# Altium PCB matrix_8x8_ws2812_LEDs.PcbDoc (part 1 of 2)
Units mm, origin at the board's own origin, x right, y up, seen from the top; angles counter-clockwise.
Board outline 65 x 70 mm, 2 copper layers (Top Layer, Bottom Layer); 134 components, 67 nets, 393 pads, 128 vias.
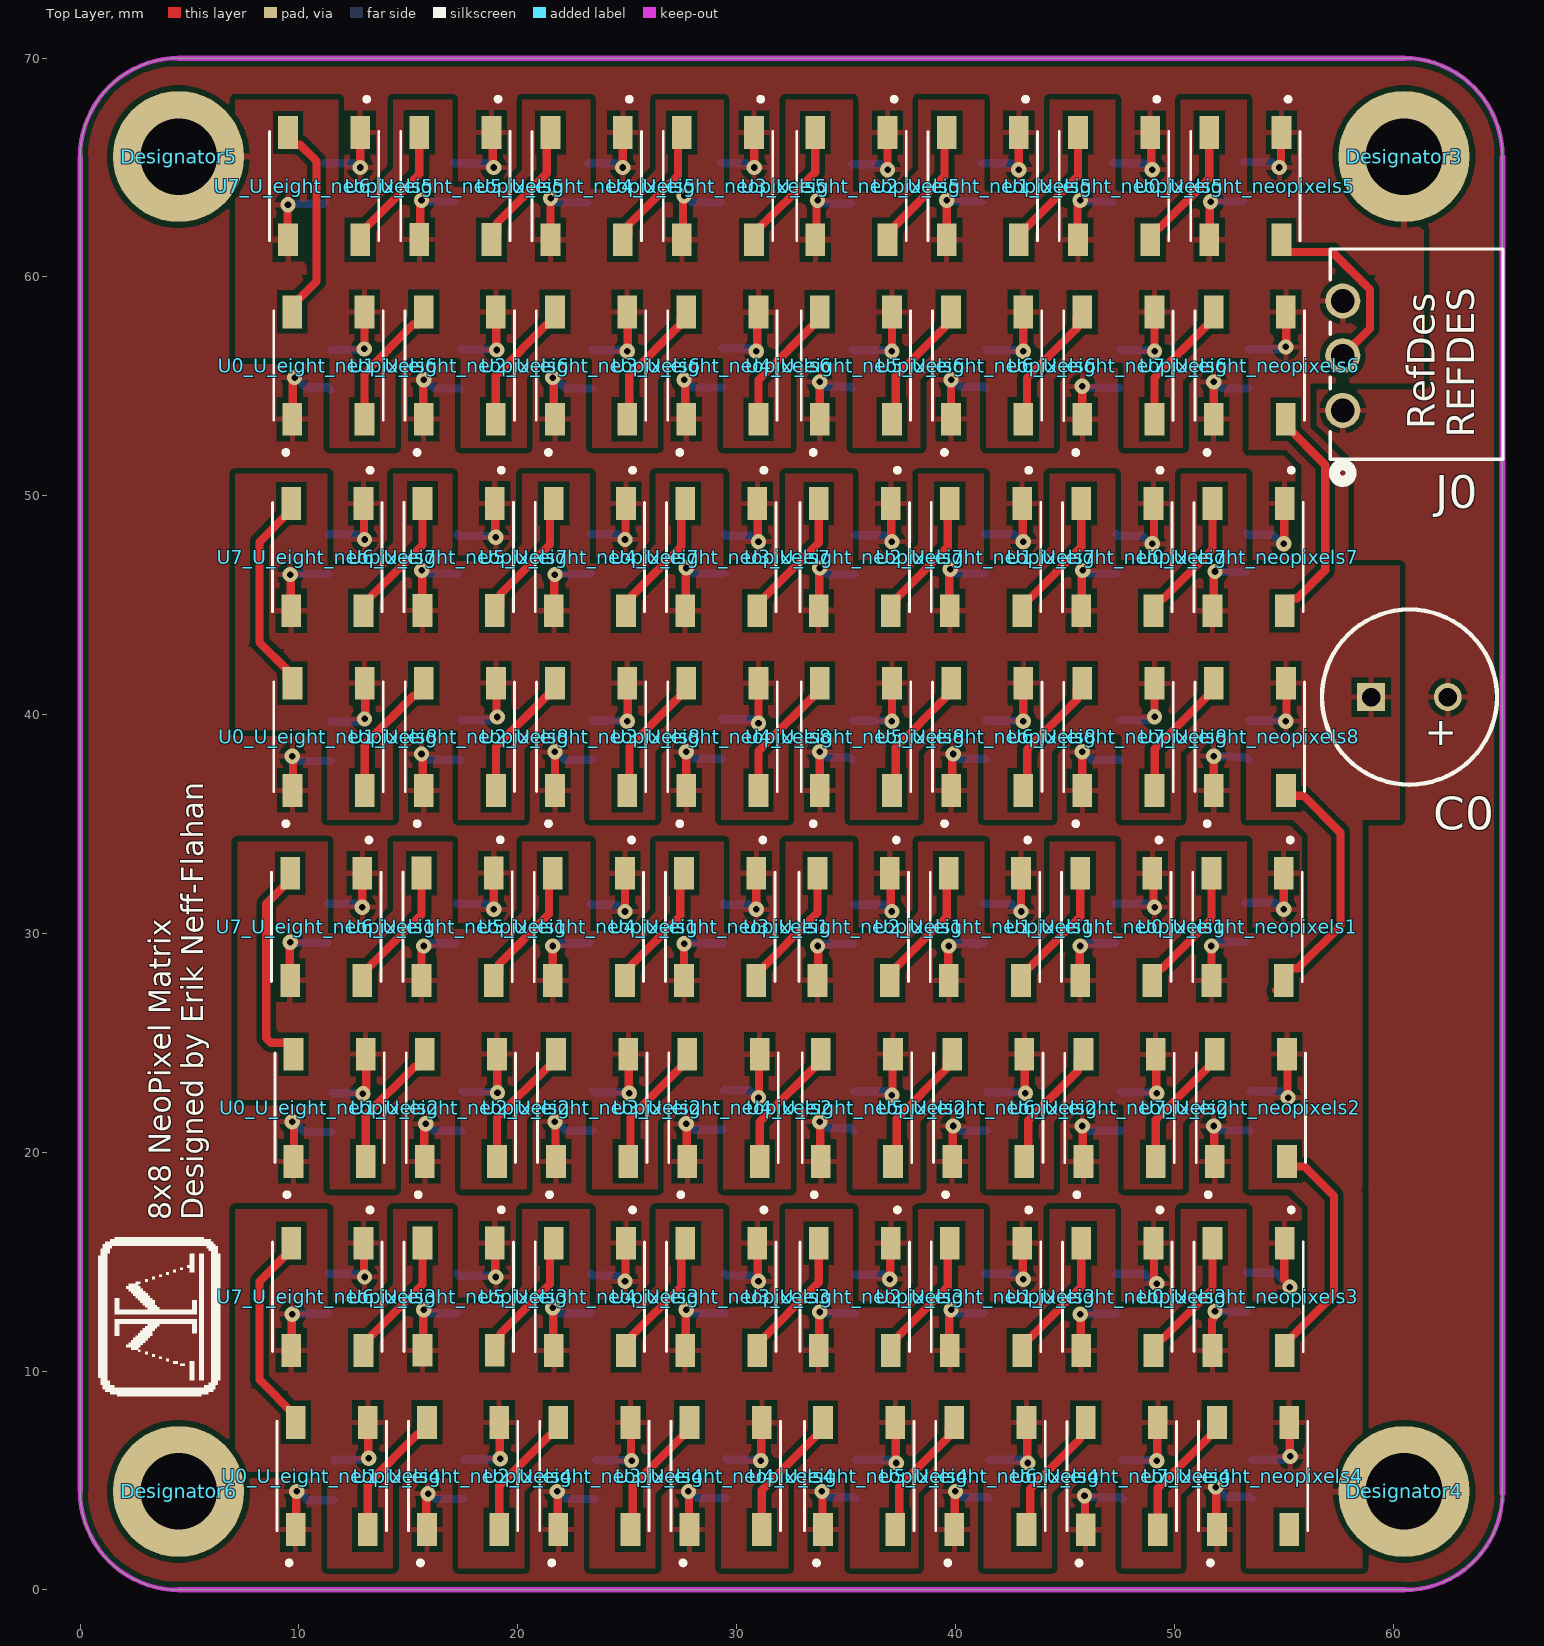
[diagram p0: Top Layer view]
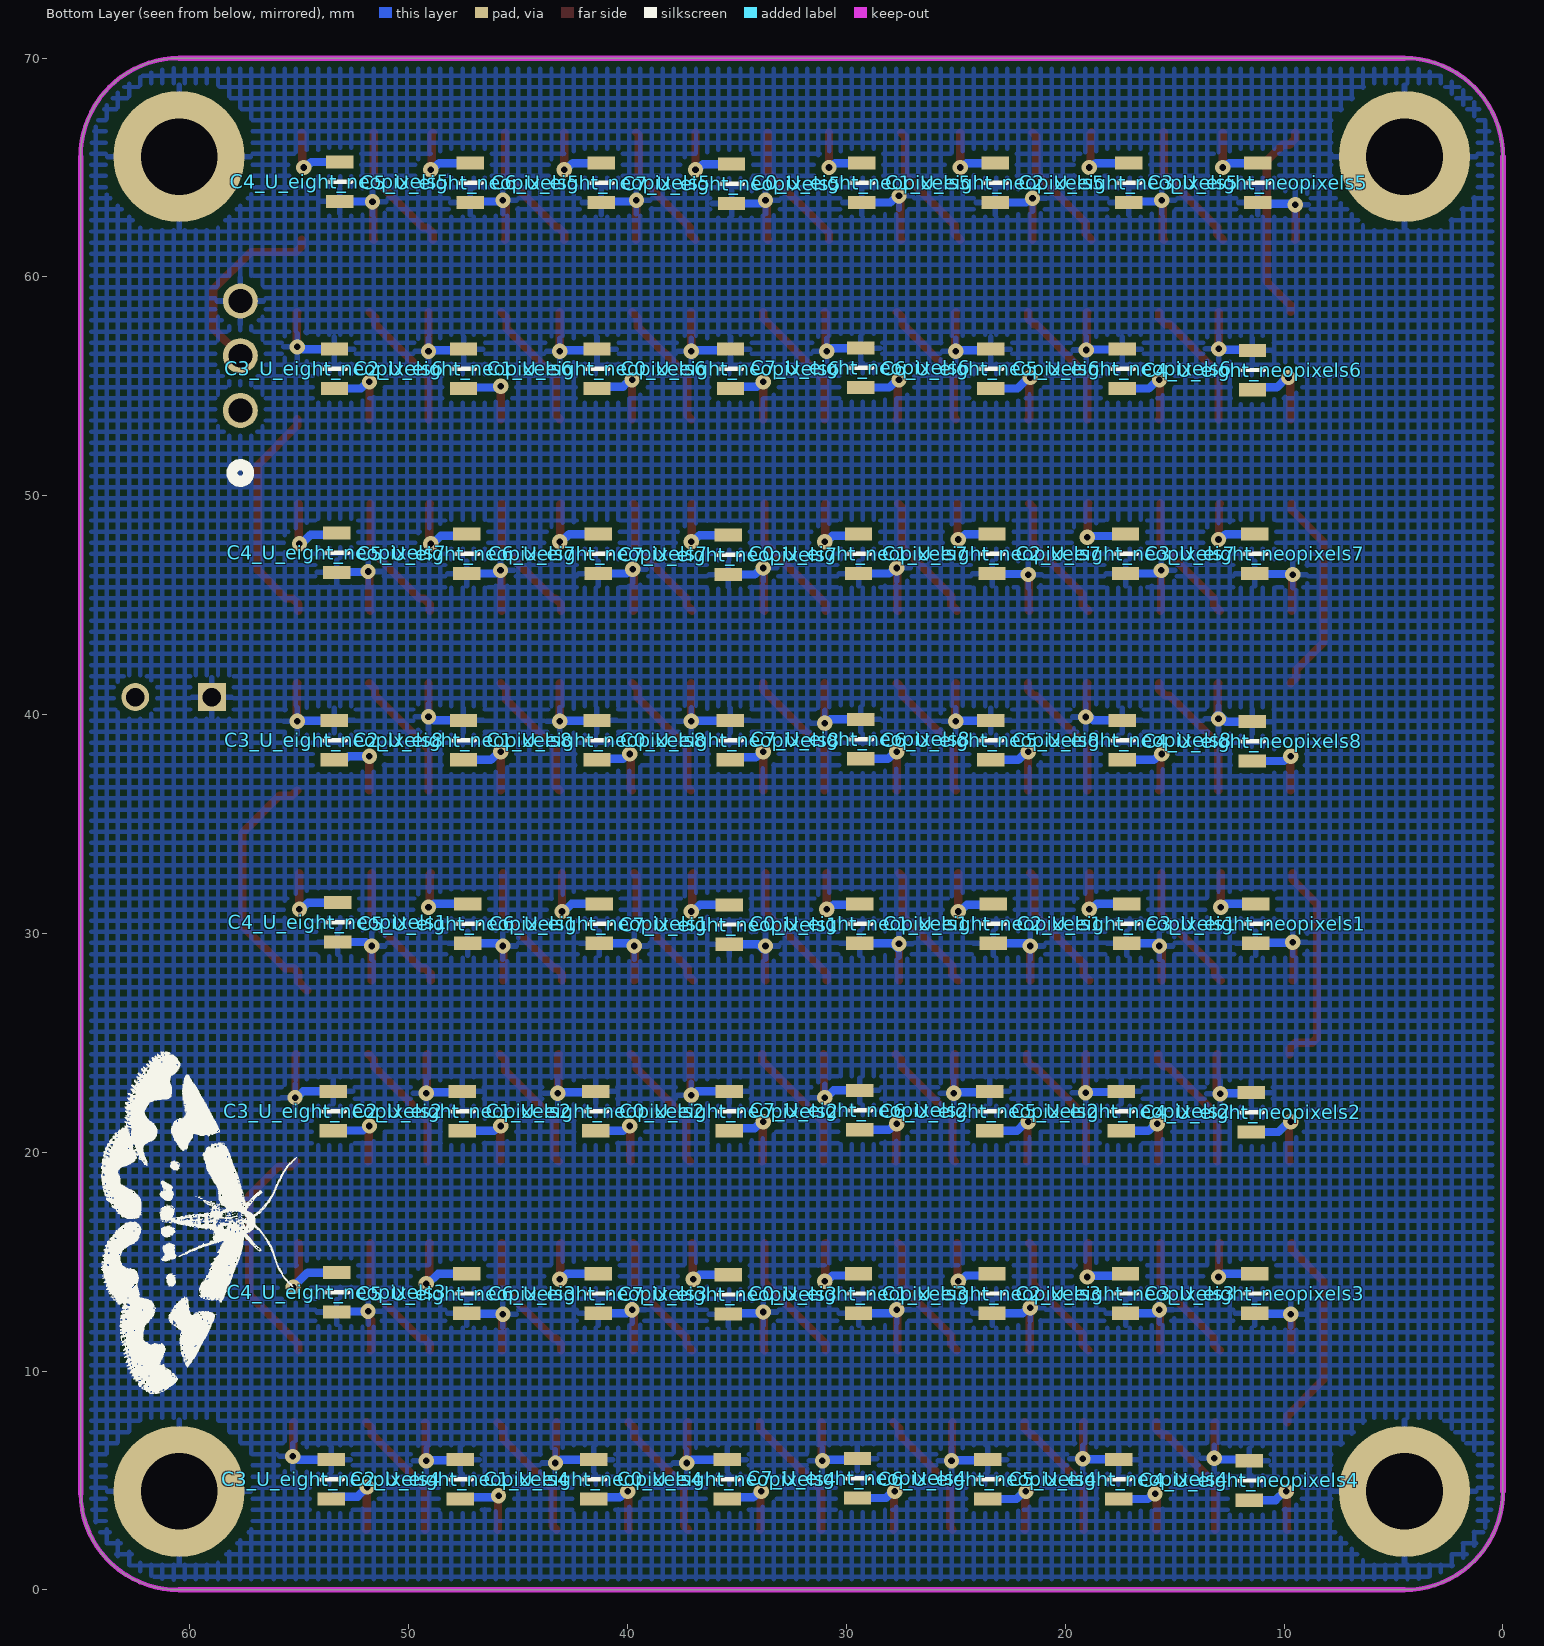
[diagram p1: Bottom Layer view, seen from below]
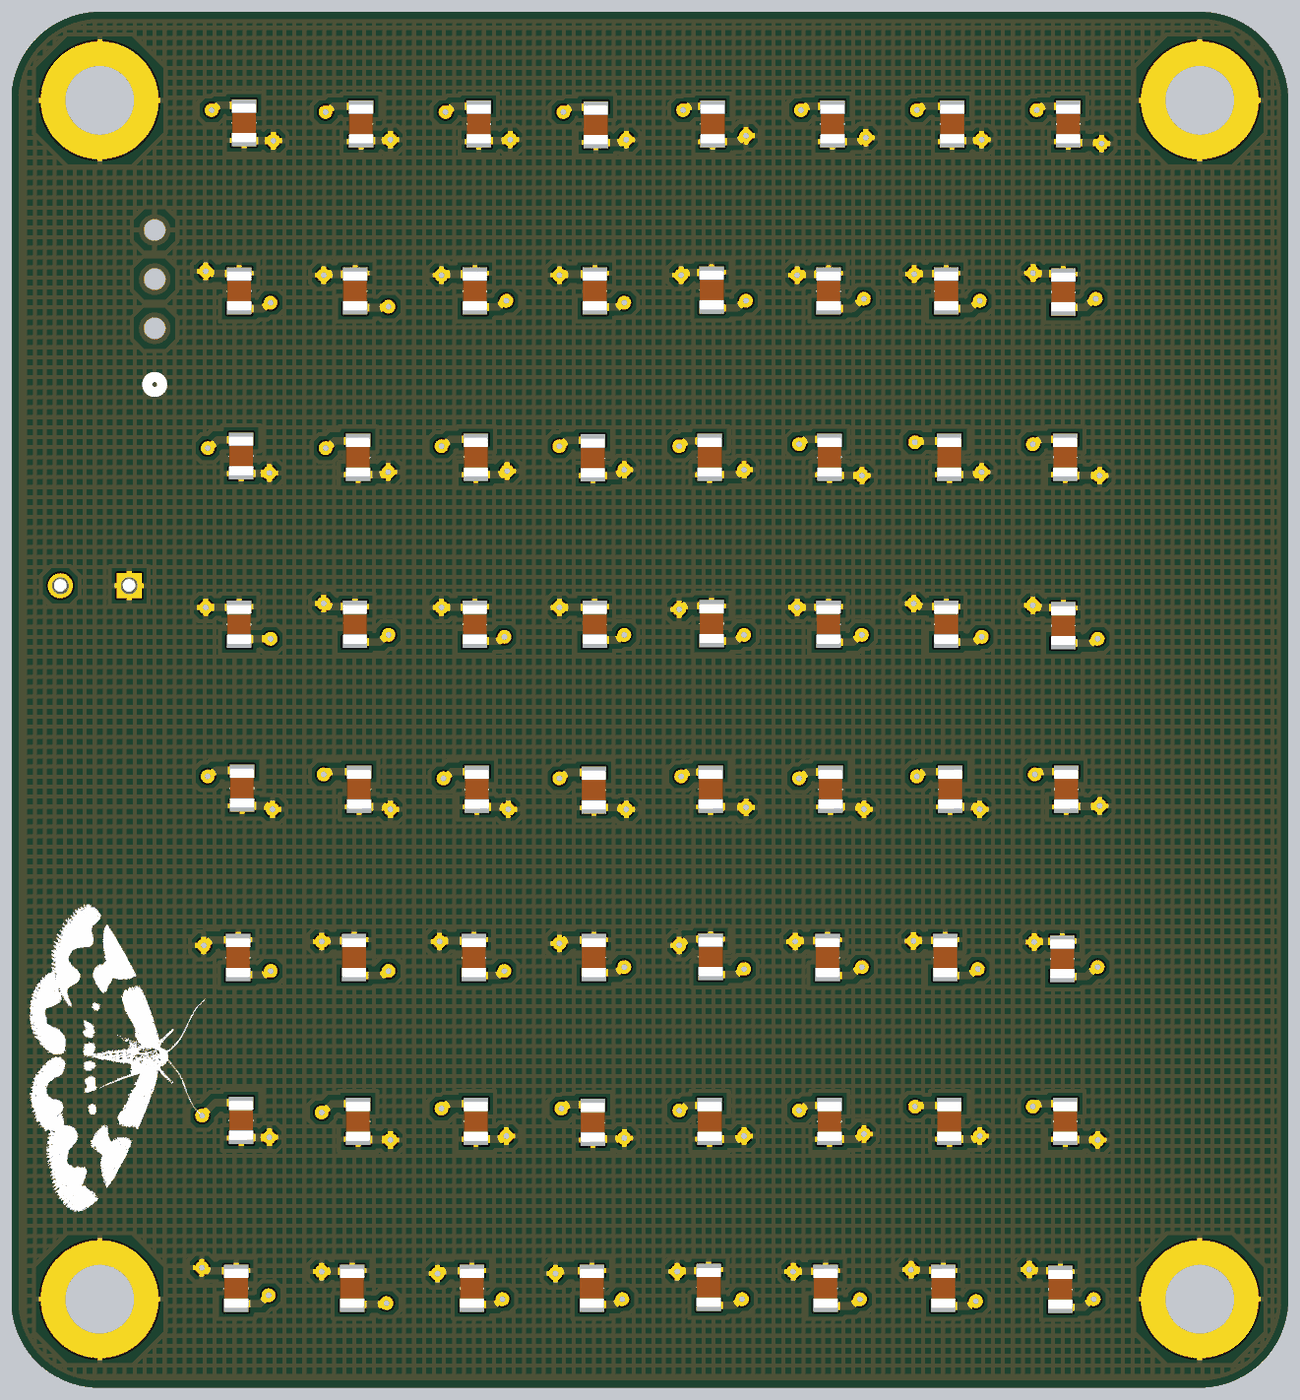
[diagram p3: 3D render of the assembled board from below, using the file's embedded part models]

## Layer stack, top to bottom
Top Solder: solder mask 0.0102, Solder Resist, Dk 3.5
Top Layer: signal copper 0.0356
Dielectric 1: dielectric 0.32, FR-4, Dk 4.8
Bottom Layer: signal copper 0.0356
Bottom Solder: solder mask 0.0102, Solder Resist, Dk 3.5

## Board outline
0,4.5 0,65.5 cw(c4.5,65.5) 4.5,70 60.5,70 cw(c60.5,65.5) 65,65.5 65,4.4 cw(c60.55,4.45) 60.5,0 4.5,0 cw(c4.5,4.5)

## Design rules (kind name [scope] priority, off if disabled: settings)
Clearance [All] p1: gap=0.254 ignorepadtopadclearanceinfootprint=FALSE
HoleSize [All] p1: absolutevalues=TRUE maxlimit=5 minlimit=0.025 maxpercent=80.000 minpercent=20.000
MinimumSolderMaskSliver [All] p1: minsoldermaskwidth=0.2
PolygonConnect [All] p1: connectstyle=Relief reliefconductorwidth=0.254 reliefentries=4 polygonreliefangle="90 Angle" airgapwidth=0.254
RoomDefinition U_eight_neopixels3 [InComponentClass('U_eight_neopixels3')] p1: confinementstyle=ConfineIn formatcopy=TRUE lockcomponents=FALSE outline 56.9,18.4 8,18.4 8,9.3 56.9,9.3
RoomDefinition U_eight_neopixels1 [InComponentClass('U_eight_neopixels1')] p2: confinementstyle=ConfineIn formatcopy=TRUE lockcomponents=FALSE outline 56.852,35.305 7.952,35.305 7.952,26.205 56.852,26.205
RoomDefinition U_eight_neopixels8 [InComponentClass('U_eight_neopixels8')] p3: confinementstyle=ConfineIn formatcopy=TRUE lockcomponents=FALSE outline 7.852,33.979 56.752,33.979 56.752,43.079 7.852,43.079
RoomDefinition U_eight_neopixels7 [InComponentClass('U_eight_neopixels7')] p4: confinementstyle=ConfineIn formatcopy=TRUE lockcomponents=FALSE outline 56.9,52.2 8,52.2 8,43.1 56.9,43.1
RoomDefinition U_eight_neopixels6 [InComponentClass('U_eight_neopixels6')] p5: confinementstyle=ConfineIn formatcopy=TRUE lockcomponents=FALSE outline 7.848,50.945 56.748,50.945 56.748,60.045 7.848,60.045
RoomDefinition U_eight_neopixels5 [InComponentClass('U_eight_neopixels5')] p6: confinementstyle=ConfineIn formatcopy=TRUE lockcomponents=FALSE outline 56.752,69.155 7.852,69.155 7.852,60.055 56.752,60.055
RoomDefinition U_eight_neopixels2 [InComponentClass('U_eight_neopixels2')] p7: confinementstyle=ConfineIn formatcopy=TRUE lockcomponents=FALSE outline 7.9,17.026 56.8,17.026 56.8,26.126 7.9,26.126
RoomDefinition U_eight_neopixels4 [InComponentClass('U_eight_neopixels4')] p8: confinementstyle=ConfineIn formatcopy=TRUE lockcomponents=FALSE outline 8,0.2 56.9,0.2 56.9,9.3 8,9.3
RoutingVias [All] p1: holewidth=0.711 width=1.27 viastyle="Through Hole" minholewidth=0.711 minwidth=1.27 maxholewidth=0.711 maxwidth=1.27
SolderMaskExpansion [All] p1: expansion=0.102 istentingtop=FALSE
SupplyNets "Schematic Supply Nets_2" [InNet('VCC')] p1: voltage=0.000
SupplyNets "Schematic Supply Nets_1" [InNet('VCC_U_eight_neopixels1')] p2: voltage=0.000
SupplyNets "Schematic Supply Nets" [InNet('GND_U_eight_neopixels1')] p3: voltage=0.000
Width Width_1 [All] p1 off: maxlimit=0.254 minlimit=0.254 preferedwidth=0.254
Width [All] p2: maxlimit=0.5 minlimit=0.254 preferedwidth=0.5 minimp=50.000000 maximp=50.000000 favimp=50.000000
28 further rules are at their usual default settings.

## Classes and differential pairs
channel class eight_neopixels: U_eight_neopixels1 U_eight_neopixels2 U_eight_neopixels3 U_eight_neopixels4 U_eight_neopixels5 U_eight_neopixels6 U_eight_neopixels7 U_eight_neopixels8
component class U_eight_neopixels8: C0_U_eight_neopixels8 C1_U_eight_neopixels8 C2_U_eight_neopixels8 C3_U_eight_neopixels8 C4_U_eight_neopixels8 C5_U_eight_neopixels8 C6_U_eight_neopixels8 C7_U_eight_neopixels8 U0_U_eight_neopixels8 U1_U_eight_neopixels8 U2_U_eight_neopixels8 U3_U_eight_neopixels8 U4_U_eight_neopixels8 U5_U_eight_neopixels8 U6_U_eight_neopixels8 U7_U_eight_neopixels8
component class U_eight_neopixels7: C0_U_eight_neopixels7 C1_U_eight_neopixels7 C2_U_eight_neopixels7 C3_U_eight_neopixels7 C4_U_eight_neopixels7 C5_U_eight_neopixels7 C6_U_eight_neopixels7 C7_U_eight_neopixels7 U0_U_eight_neopixels7 U1_U_eight_neopixels7 U2_U_eight_neopixels7 U3_U_eight_neopixels7 U4_U_eight_neopixels7 U5_U_eight_neopixels7 U6_U_eight_neopixels7 U7_U_eight_neopixels7
component class U_eight_neopixels6: C0_U_eight_neopixels6 C1_U_eight_neopixels6 C2_U_eight_neopixels6 C3_U_eight_neopixels6 C4_U_eight_neopixels6 C5_U_eight_neopixels6 C6_U_eight_neopixels6 C7_U_eight_neopixels6 U0_U_eight_neopixels6 U1_U_eight_neopixels6 U2_U_eight_neopixels6 U3_U_eight_neopixels6 U4_U_eight_neopixels6 U5_U_eight_neopixels6 U6_U_eight_neopixels6 U7_U_eight_neopixels6
component class U_eight_neopixels5: C0_U_eight_neopixels5 C1_U_eight_neopixels5 C2_U_eight_neopixels5 C3_U_eight_neopixels5 C4_U_eight_neopixels5 C5_U_eight_neopixels5 C6_U_eight_neopixels5 C7_U_eight_neopixels5 U0_U_eight_neopixels5 U1_U_eight_neopixels5 U2_U_eight_neopixels5 U3_U_eight_neopixels5 U4_U_eight_neopixels5 U5_U_eight_neopixels5 U6_U_eight_neopixels5 U7_U_eight_neopixels5
component class U_eight_neopixels4: C0_U_eight_neopixels4 C1_U_eight_neopixels4 C2_U_eight_neopixels4 C3_U_eight_neopixels4 C4_U_eight_neopixels4 C5_U_eight_neopixels4 C6_U_eight_neopixels4 C7_U_eight_neopixels4 U0_U_eight_neopixels4 U1_U_eight_neopixels4 U2_U_eight_neopixels4 U3_U_eight_neopixels4 U4_U_eight_neopixels4 U5_U_eight_neopixels4 U6_U_eight_neopixels4 U7_U_eight_neopixels4
component class U_eight_neopixels3: C0_U_eight_neopixels3 C1_U_eight_neopixels3 C2_U_eight_neopixels3 C3_U_eight_neopixels3 C4_U_eight_neopixels3 C5_U_eight_neopixels3 C6_U_eight_neopixels3 C7_U_eight_neopixels3 U0_U_eight_neopixels3 U1_U_eight_neopixels3 U2_U_eight_neopixels3 U3_U_eight_neopixels3 U4_U_eight_neopixels3 U5_U_eight_neopixels3 U6_U_eight_neopixels3 U7_U_eight_neopixels3
component class U_eight_neopixels2: C0_U_eight_neopixels2 C1_U_eight_neopixels2 C2_U_eight_neopixels2 C3_U_eight_neopixels2 C4_U_eight_neopixels2 C5_U_eight_neopixels2 C6_U_eight_neopixels2 C7_U_eight_neopixels2 U0_U_eight_neopixels2 U1_U_eight_neopixels2 U2_U_eight_neopixels2 U3_U_eight_neopixels2 U4_U_eight_neopixels2 U5_U_eight_neopixels2 U6_U_eight_neopixels2 U7_U_eight_neopixels2
component class U_eight_neopixels1: C0_U_eight_neopixels1 C1_U_eight_neopixels1 C2_U_eight_neopixels1 C3_U_eight_neopixels1 C4_U_eight_neopixels1 C5_U_eight_neopixels1 C6_U_eight_neopixels1 C7_U_eight_neopixels1 U0_U_eight_neopixels1 U1_U_eight_neopixels1 U2_U_eight_neopixels1 U3_U_eight_neopixels1 U4_U_eight_neopixels1 U5_U_eight_neopixels1 U6_U_eight_neopixels1 U7_U_eight_neopixels1
component class matrix_8x8_ws2812_LEDs: C0 J0

## Components (designator, comment, footprint, x,y, rotation, side; value= is the part's Value field where it differs from the comment)
C0 "Thru-Hole Polarized" "[Cap] Thru-Hole Polarized 3.5mm" 60.75,40.818 r180 top
C0_U_eight_neopixels1 "SMD Nonpolarized" "[Cap] SMD 0805" 29.4,30.45 r90 bottom (schematic designator C0)
C0_U_eight_neopixels2 "SMD Nonpolarized" "[Cap] SMD 0805" 35.352,21.881 r270 bottom (schematic designator C0)
C0_U_eight_neopixels3 "SMD Nonpolarized" "[Cap] SMD 0805" 29.448,13.545 r90 bottom (schematic designator C0)
C0_U_eight_neopixels4 "SMD Nonpolarized" "[Cap] SMD 0805" 35.452,5.055 r270 bottom (schematic designator C0)
C0_U_eight_neopixels5 "SMD Nonpolarized" "[Cap] SMD 0805" 29.3,64.3 r90 bottom (schematic designator C0)
C0_U_eight_neopixels6 "SMD Nonpolarized" "[Cap] SMD 0805" 35.3,55.8 r270 bottom (schematic designator C0)
C0_U_eight_neopixels7 "SMD Nonpolarized" "[Cap] SMD 0805" 29.448,47.345 r90 bottom (schematic designator C0)
C0_U_eight_neopixels8 "SMD Nonpolarized" "[Cap] SMD 0805" 35.304,38.834 r270 bottom (schematic designator C0)
C1_U_eight_neopixels1 "SMD Nonpolarized" "[Cap] SMD 0805" 23.3,30.45 r90 bottom (schematic designator C1)
C1_U_eight_neopixels2 "SMD Nonpolarized" "[Cap] SMD 0805" 41.452,21.881 r270 bottom (schematic designator C1)
C1_U_eight_neopixels3 "SMD Nonpolarized" "[Cap] SMD 0805" 23.348,13.545 r90 bottom (schematic designator C1)
C1_U_eight_neopixels4 "SMD Nonpolarized" "[Cap] SMD 0805" 41.552,5.055 r270 bottom (schematic designator C1)
C1_U_eight_neopixels5 "SMD Nonpolarized" "[Cap] SMD 0805" 23.2,64.3 r90 bottom (schematic designator C1)
C1_U_eight_neopixels6 "SMD Nonpolarized" "[Cap] SMD 0805" 41.4,55.8 r270 bottom (schematic designator C1)
C1_U_eight_neopixels7 "SMD Nonpolarized" "[Cap] SMD 0805" 23.348,47.345 r90 bottom (schematic designator C1)
C1_U_eight_neopixels8 "SMD Nonpolarized" "[Cap] SMD 0805" 41.404,38.834 r270 bottom (schematic designator C1)
C2_U_eight_neopixels1 "SMD Nonpolarized" "[Cap] SMD 0805" 17.2,30.45 r90 bottom (schematic designator C2)
C2_U_eight_neopixels2 "SMD Nonpolarized" "[Cap] SMD 0805" 47.552,21.881 r270 bottom (schematic designator C2)
C2_U_eight_neopixels3 "SMD Nonpolarized" "[Cap] SMD 0805" 17.248,13.545 r90 bottom (schematic designator C2)
C2_U_eight_neopixels4 "SMD Nonpolarized" "[Cap] SMD 0805" 47.652,5.055 r270 bottom (schematic designator C2)
C2_U_eight_neopixels5 "SMD Nonpolarized" "[Cap] SMD 0805" 17.1,64.3 r90 bottom (schematic designator C2)
C2_U_eight_neopixels6 "SMD Nonpolarized" "[Cap] SMD 0805" 47.5,55.8 r270 bottom (schematic designator C2)
C2_U_eight_neopixels7 "SMD Nonpolarized" "[Cap] SMD 0805" 17.248,47.345 r90 bottom (schematic designator C2)
C2_U_eight_neopixels8 "SMD Nonpolarized" "[Cap] SMD 0805" 47.504,38.834 r270 bottom (schematic designator C2)
C3_U_eight_neopixels1 "SMD Nonpolarized" "[Cap] SMD 0805" 11.3,30.45 r90 bottom (schematic designator C3)
C3_U_eight_neopixels2 "SMD Nonpolarized" "[Cap] SMD 0805" 53.452,21.881 r270 bottom (schematic designator C3)
C3_U_eight_neopixels3 "SMD Nonpolarized" "[Cap] SMD 0805" 11.348,13.545 r90 bottom (schematic designator C3)
C3_U_eight_neopixels4 "SMD Nonpolarized" "[Cap] SMD 0805" 53.552,5.055 r270 bottom (schematic designator C3)
C3_U_eight_neopixels5 "SMD Nonpolarized" "[Cap] SMD 0805" 11.2,64.3 r90 bottom (schematic designator C3)
C3_U_eight_neopixels6 "SMD Nonpolarized" "[Cap] SMD 0805" 53.4,55.8 r270 bottom (schematic designator C3)
C3_U_eight_neopixels7 "SMD Nonpolarized" "[Cap] SMD 0805" 11.348,47.345 r90 bottom (schematic designator C3)
C3_U_eight_neopixels8 "SMD Nonpolarized" "[Cap] SMD 0805" 53.404,38.834 r270 bottom (schematic designator C3)
C4_U_eight_neopixels1 "SMD Nonpolarized" "[Cap] SMD 0805" 53.252,30.505 r90 bottom (schematic designator C4)
C4_U_eight_neopixels2 "SMD Nonpolarized" "[Cap] SMD 0805" 11.5,21.826 r270 bottom (schematic designator C4)
C4_U_eight_neopixels3 "SMD Nonpolarized" "[Cap] SMD 0805" 53.3,13.6 r90 bottom (schematic designator C4)
C4_U_eight_neopixels4 "SMD Nonpolarized" "[Cap] SMD 0805" 11.6,5 r270 bottom (schematic designator C4)
C4_U_eight_neopixels5 "SMD Nonpolarized" "[Cap] SMD 0805" 53.152,64.355 r90 bottom (schematic designator C4)
C4_U_eight_neopixels6 "SMD Nonpolarized" "[Cap] SMD 0805" 11.448,55.745 r270 bottom (schematic designator C4)
C4_U_eight_neopixels7 "SMD Nonpolarized" "[Cap] SMD 0805" 53.3,47.4 r90 bottom (schematic designator C4)
C4_U_eight_neopixels8 "SMD Nonpolarized" "[Cap] SMD 0805" 11.452,38.779 r270 bottom (schematic designator C4)
C5_U_eight_neopixels1 "SMD Nonpolarized" "[Cap] SMD 0805" 47.3,30.45 r90 bottom (schematic designator C5)
C5_U_eight_neopixels2 "SMD Nonpolarized" "[Cap] SMD 0805" 17.452,21.881 r270 bottom (schematic designator C5)
C5_U_eight_neopixels3 "SMD Nonpolarized" "[Cap] SMD 0805" 47.348,13.545 r90 bottom (schematic designator C5)
C5_U_eight_neopixels4 "SMD Nonpolarized" "[Cap] SMD 0805" 17.552,5.055 r270 bottom (schematic designator C5)
C5_U_eight_neopixels5 "SMD Nonpolarized" "[Cap] SMD 0805" 47.2,64.3 r90 bottom (schematic designator C5)
C5_U_eight_neopixels6 "SMD Nonpolarized" "[Cap] SMD 0805" 17.4,55.8 r270 bottom (schematic designator C5)
C5_U_eight_neopixels7 "SMD Nonpolarized" "[Cap] SMD 0805" 47.348,47.345 r90 bottom (schematic designator C5)
C5_U_eight_neopixels8 "SMD Nonpolarized" "[Cap] SMD 0805" 17.404,38.834 r270 bottom (schematic designator C5)
C6_U_eight_neopixels1 "SMD Nonpolarized" "[Cap] SMD 0805" 41.3,30.45 r90 bottom (schematic designator C6)
C6_U_eight_neopixels2 "SMD Nonpolarized" "[Cap] SMD 0805" 23.452,21.881 r270 bottom (schematic designator C6)
C6_U_eight_neopixels3 "SMD Nonpolarized" "[Cap] SMD 0805" 41.348,13.545 r90 bottom (schematic designator C6)
C6_U_eight_neopixels4 "SMD Nonpolarized" "[Cap] SMD 0805" 23.552,5.055 r270 bottom (schematic designator C6)
C6_U_eight_neopixels5 "SMD Nonpolarized" "[Cap] SMD 0805" 41.2,64.3 r90 bottom (schematic designator C6)
C6_U_eight_neopixels6 "SMD Nonpolarized" "[Cap] SMD 0805" 23.4,55.8 r270 bottom (schematic designator C6)
C6_U_eight_neopixels7 "SMD Nonpolarized" "[Cap] SMD 0805" 41.348,47.345 r90 bottom (schematic designator C6)
C6_U_eight_neopixels8 "SMD Nonpolarized" "[Cap] SMD 0805" 23.404,38.834 r270 bottom (schematic designator C6)
C7_U_eight_neopixels1 "SMD Nonpolarized" "[Cap] SMD 0805" 35.352,30.405 r90 bottom (schematic designator C7)
C7_U_eight_neopixels2 "SMD Nonpolarized" "[Cap] SMD 0805" 29.4,21.926 r270 bottom (schematic designator C7)
C7_U_eight_neopixels3 "SMD Nonpolarized" "[Cap] SMD 0805" 35.4,13.5 r90 bottom (schematic designator C7)
C7_U_eight_neopixels4 "SMD Nonpolarized" "[Cap] SMD 0805" 29.5,5.1 r270 bottom (schematic designator C7)
C7_U_eight_neopixels5 "SMD Nonpolarized" "[Cap] SMD 0805" 35.252,64.255 r90 bottom (schematic designator C7)
C7_U_eight_neopixels6 "SMD Nonpolarized" "[Cap] SMD 0805" 29.348,55.845 r270 bottom (schematic designator C7)
C7_U_eight_neopixels7 "SMD Nonpolarized" "[Cap] SMD 0805" 35.4,47.3 r90 bottom (schematic designator C7)
C7_U_eight_neopixels8 "SMD Nonpolarized" "[Cap] SMD 0805" 29.352,38.879 r270 bottom (schematic designator C7)
Designator3 "Comment" "[Mount] M3 Mount Hole" 60.5,65.5 r0 top
Designator4 "Comment" "[Mount] M3 Mount Hole" 60.5,4.5 r0 top
Designator5 "Comment" "[Mount] M3 Mount Hole" 4.5,65.5 r0 top
Designator6 "Comment" "[Mount] M3 Mount Hole" 4.5,4.5 r0 top
J0 "1778638" CONN_1814854 57.7,59.05 r90 top
U0_U_eight_neopixels1 "WS2812B-B" LED_WS2812B-B 53.35,30.3 r270 top (schematic designator U0)
U0_U_eight_neopixels2 "WS2812B-B" LED_WS2812B-B 11.402,22.031 r90 top (schematic designator U0)
U0_U_eight_neopixels3 "WS2812B-B" LED_WS2812B-B 53.398,13.395 r270 top (schematic designator U0)
U0_U_eight_neopixels4 "WS2812B-B" LED_WS2812B-B 11.502,5.205 r90 top (schematic designator U0)
U0_U_eight_neopixels5 "WS2812B-B" LED_WS2812B-B 53.25,64.15 r270 top (schematic designator U0)
U0_U_eight_neopixels6 "WS2812B-B" LED_WS2812B-B 11.35,55.95 r90 top (schematic designator U0)
U0_U_eight_neopixels7 "WS2812B-B" LED_WS2812B-B 53.398,47.195 r270 top (schematic designator U0)
U0_U_eight_neopixels8 "WS2812B-B" LED_WS2812B-B 11.354,38.984 r90 top (schematic designator U0)
U1_U_eight_neopixels1 "WS2812B-B" LED_WS2812B-B 47.35,30.3 r270 top (schematic designator U1)
U1_U_eight_neopixels2 "WS2812B-B" LED_WS2812B-B 17.402,22.031 r90 top (schematic designator U1)
U1_U_eight_neopixels3 "WS2812B-B" LED_WS2812B-B 47.398,13.395 r270 top (schematic designator U1)
U1_U_eight_neopixels4 "WS2812B-B" LED_WS2812B-B 17.502,5.205 r90 top (schematic designator U1)
U1_U_eight_neopixels5 "WS2812B-B" LED_WS2812B-B 47.25,64.15 r270 top (schematic designator U1)
U1_U_eight_neopixels6 "WS2812B-B" LED_WS2812B-B 17.35,55.95 r90 top (schematic designator U1)
U1_U_eight_neopixels7 "WS2812B-B" LED_WS2812B-B 47.398,47.195 r270 top (schematic designator U1)
U1_U_eight_neopixels8 "WS2812B-B" LED_WS2812B-B 17.354,38.984 r90 top (schematic designator U1)
U2_U_eight_neopixels1 "WS2812B-B" LED_WS2812B-B 41.35,30.3 r270 top (schematic designator U2)
U2_U_eight_neopixels2 "WS2812B-B" LED_WS2812B-B 23.402,22.031 r90 top (schematic designator U2)
U2_U_eight_neopixels3 "WS2812B-B" LED_WS2812B-B 41.398,13.395 r270 top (schematic designator U2)
U2_U_eight_neopixels4 "WS2812B-B" LED_WS2812B-B 23.502,5.205 r90 top (schematic designator U2)
U2_U_eight_neopixels5 "WS2812B-B" LED_WS2812B-B 41.25,64.15 r270 top (schematic designator U2)
U2_U_eight_neopixels6 "WS2812B-B" LED_WS2812B-B 23.35,55.95 r90 top (schematic designator U2)
U2_U_eight_neopixels7 "WS2812B-B" LED_WS2812B-B 41.398,47.195 r270 top (schematic designator U2)
U2_U_eight_neopixels8 "WS2812B-B" LED_WS2812B-B 23.354,38.984 r90 top (schematic designator U2)
U3_U_eight_neopixels1 "WS2812B-B" LED_WS2812B-B 35.35,30.3 r270 top (schematic designator U3)
U3_U_eight_neopixels2 "WS2812B-B" LED_WS2812B-B 29.402,22.031 r90 top (schematic designator U3)
U3_U_eight_neopixels3 "WS2812B-B" LED_WS2812B-B 35.398,13.395 r270 top (schematic designator U3)
U3_U_eight_neopixels4 "WS2812B-B" LED_WS2812B-B 29.502,5.205 r90 top (schematic designator U3)
U3_U_eight_neopixels5 "WS2812B-B" LED_WS2812B-B 35.25,64.15 r270 top (schematic designator U3)
U3_U_eight_neopixels6 "WS2812B-B" LED_WS2812B-B 29.35,55.95 r90 top (schematic designator U3)
U3_U_eight_neopixels7 "WS2812B-B" LED_WS2812B-B 35.398,47.195 r270 top (schematic designator U3)
U3_U_eight_neopixels8 "WS2812B-B" LED_WS2812B-B 29.354,38.984 r90 top (schematic designator U3)
U4_U_eight_neopixels1 "WS2812B-B" LED_WS2812B-B 29.25,30.3 r270 top (schematic designator U4)
U4_U_eight_neopixels2 "WS2812B-B" LED_WS2812B-B 35.502,22.031 r90 top (schematic designator U4)
U4_U_eight_neopixels3 "WS2812B-B" LED_WS2812B-B 29.298,13.395 r270 top (schematic designator U4)
U4_U_eight_neopixels4 "WS2812B-B" LED_WS2812B-B 35.602,5.205 r90 top (schematic designator U4)
U4_U_eight_neopixels5 "WS2812B-B" LED_WS2812B-B 29.15,64.15 r270 top (schematic designator U4)
U4_U_eight_neopixels6 "WS2812B-B" LED_WS2812B-B 35.45,55.95 r90 top (schematic designator U4)
U4_U_eight_neopixels7 "WS2812B-B" LED_WS2812B-B 29.298,47.195 r270 top (schematic designator U4)
U4_U_eight_neopixels8 "WS2812B-B" LED_WS2812B-B 35.454,38.985 r90 top (schematic designator U4)
U5_U_eight_neopixels1 "WS2812B-B" LED_WS2812B-B 23.25,30.3 r270 top (schematic designator U5)
U5_U_eight_neopixels2 "WS2812B-B" LED_WS2812B-B 41.502,22.031 r90 top (schematic designator U5)
U5_U_eight_neopixels3 "WS2812B-B" LED_WS2812B-B 23.298,13.395 r270 top (schematic designator U5)
U5_U_eight_neopixels4 "WS2812B-B" LED_WS2812B-B 41.602,5.205 r90 top (schematic designator U5)
U5_U_eight_neopixels5 "WS2812B-B" LED_WS2812B-B 23.15,64.15 r270 top (schematic designator U5)
U5_U_eight_neopixels6 "WS2812B-B" LED_WS2812B-B 41.45,55.95 r90 top (schematic designator U5)
U5_U_eight_neopixels7 "WS2812B-B" LED_WS2812B-B 23.298,47.195 r270 top (schematic designator U5)
U5_U_eight_neopixels8 "WS2812B-B" LED_WS2812B-B 41.454,38.985 r90 top (schematic designator U5)
U6_U_eight_neopixels1 "WS2812B-B" LED_WS2812B-B 17.252,30.305 r270 top (schematic designator U6)
U6_U_eight_neopixels2 "WS2812B-B" LED_WS2812B-B 47.5,22.026 r90 top (schematic designator U6)
U6_U_eight_neopixels3 "WS2812B-B" LED_WS2812B-B 17.3,13.4 r270 top (schematic designator U6)
U6_U_eight_neopixels4 "WS2812B-B" LED_WS2812B-B 47.6,5.2 r90 top (schematic designator U6)
U6_U_eight_neopixels5 "WS2812B-B" LED_WS2812B-B 17.152,64.155 r270 top (schematic designator U6)
U6_U_eight_neopixels6 "WS2812B-B" LED_WS2812B-B 47.448,55.945 r90 top (schematic designator U6)
U6_U_eight_neopixels7 "WS2812B-B" LED_WS2812B-B 17.3,47.2 r270 top (schematic designator U6)
U6_U_eight_neopixels8 "WS2812B-B" LED_WS2812B-B 47.452,38.98 r90 top (schematic designator U6)
U7_U_eight_neopixels1 "WS2812B-B" LED_WS2812B-B 11.25,30.3 r270 top (schematic designator U7)
U7_U_eight_neopixels2 "WS2812B-B" LED_WS2812B-B 53.502,22.031 r90 top (schematic designator U7)
U7_U_eight_neopixels3 "WS2812B-B" LED_WS2812B-B 11.298,13.395 r270 top (schematic designator U7)
U7_U_eight_neopixels4 "WS2812B-B" LED_WS2812B-B 53.602,5.205 r90 top (schematic designator U7)
U7_U_eight_neopixels5 "WS2812B-B" LED_WS2812B-B 11.15,64.15 r270 top (schematic designator U7)
U7_U_eight_neopixels6 "WS2812B-B" LED_WS2812B-B 53.45,55.95 r90 top (schematic designator U7)
U7_U_eight_neopixels7 "WS2812B-B" LED_WS2812B-B 11.298,47.195 r270 top (schematic designator U7)
U7_U_eight_neopixels8 "WS2812B-B" LED_WS2812B-B 53.454,38.985 r90 top (schematic designator U7)

## Footprints (in the part's own frame and the unit in brackets; to place one, negate y for a bottom-side part, rotate by r counter-clockwise, add the part's x,y. Pads: shape width x height; smd on the part's side, far side on the other; paste and mask are expansions set on the pad)
"[Cap] SMD 0805" [mm]
  rect 0.6x1.25 smd: 1(-0.9,0) 2(0.9,0)
  silkscreen extent 0,-0.53 0,0.53, body extent -1,-0.63 1,0.63, height 1
"[Cap] Thru-Hole Polarized 3.5mm" [mm] "3.5mm"
  round 1.275 hole 0.85: 1(-1.75,0.018)
  rect 1.275x1.275 hole 0.85: 2(1.75,0.018)
  silkscreen extent -4,-3.98 4,4.02, body extent -4.24,-4.25 4.24,4.25, height 13
"[Mount] M3 Mount Hole" [mm]
  round 6 hole 3.5: 1(0,0)
CONN_1814854 [mil]
  round 63 / inner round 60 / far side round 63 hole 43 paste-99999 mask-31.5: 1(-202.76,0) 2(-104.33,0) 3(-5.91,0)
  silkscreen extent -330,-288 88,23
LED_WS2812B-B [mm]
  rect 1.5x0.9 smd: 1(-2.45,1.65) 2(-2.45,-1.65) 3(2.45,-1.65) 4(2.45,1.65)
  silkscreen extent -4.07,-2.5 2.5,2.5

## Part data
C0: library part "[Cap] Thru-Hole Polarized", Capacitance=1000uF, Tolerance=20%, Voltage=10V, Pin Spacing=5.0mm
C0_U_eight_neopixels1 C0_U_eight_neopixels2 C0_U_eight_neopixels3 C0_U_eight_neopixels4 C0_U_eight_neopixels5 C0_U_eight_neopixels6 C0_U_eight_neopixels7 C0_U_eight_neopixels8 C1_U_eight_neopixels1 C1_U_eight_neopixels2 C1_U_eight_neopixels3 C1_U_eight_neopixels4 C1_U_eight_neopixels5 C1_U_eight_neopixels6 C1_U_eight_neopixels7 C1_U_eight_neopixels8 C2_U_eight_neopixels1 C2_U_eight_neopixels2 C2_U_eight_neopixels3 C2_U_eight_neopixels4 C2_U_eight_neopixels5 C2_U_eight_neopixels6 C2_U_eight_neopixels7 C2_U_eight_neopixels8 C3_U_eight_neopixels1 C3_U_eight_neopixels2 C3_U_eight_neopixels3 C3_U_eight_neopixels4 C3_U_eight_neopixels5 C3_U_eight_neopixels6 C3_U_eight_neopixels7 C3_U_eight_neopixels8 C4_U_eight_neopixels1 C4_U_eight_neopixels2 C4_U_eight_neopixels3 C4_U_eight_neopixels4 C4_U_eight_neopixels5 C4_U_eight_neopixels6 C4_U_eight_neopixels7 C4_U_eight_neopixels8 C5_U_eight_neopixels1 C5_U_eight_neopixels2 C5_U_eight_neopixels3 C5_U_eight_neopixels4 C5_U_eight_neopixels5 C5_U_eight_neopixels6 C5_U_eight_neopixels7 C5_U_eight_neopixels8 C6_U_eight_neopixels1 C6_U_eight_neopixels2 C6_U_eight_neopixels3 C6_U_eight_neopixels4 C6_U_eight_neopixels5 C6_U_eight_neopixels6 C6_U_eight_neopixels7 C6_U_eight_neopixels8 C7_U_eight_neopixels1 C7_U_eight_neopixels2 C7_U_eight_neopixels3 C7_U_eight_neopixels4 C7_U_eight_neopixels5 C7_U_eight_neopixels6 C7_U_eight_neopixels7 C7_U_eight_neopixels8: library part "[Cap] SMD Nonpolarized", Capacitance=0.1uF, Size Package=0805, Tolerance=10%, Voltage=6.3V
J0: "PCB headers, nominal cross section: 0.5 mmÂ², color: black, nominal current: 6 A, rated voltage (III/2): 160 V, contact surface: Tin, contact connection type: Pin, number of potentials: 3, number of rows: 1, number of positions: 3, number of connections: 3, product range: PTSM 0,5/..-HH-THR, pitch: 2.5 mm, mounting: THR soldering, pin layout: Linear pinning, solder pin [P]: 2.1 mm, number of solder pins per potential: 1, plug-in system: COMBICON PTSM, Pin connector pattern alignment: Standard, locking: without, mounting: without, type of packaging: 32 mm wide tape", Manufacturer_Name="Phoenix Contact", Copyright="Copyright (C) 2025 Ultra Librarian. All rights reserved.", Manufacturer_Part_Number=1778638, RefDes=RefDes, Type=Type
U0_U_eight_neopixels1 U0_U_eight_neopixels2 U0_U_eight_neopixels3 U0_U_eight_neopixels4 U0_U_eight_neopixels5 U0_U_eight_neopixels6 U0_U_eight_neopixels7 U0_U_eight_neopixels8 U1_U_eight_neopixels1 U1_U_eight_neopixels2 U1_U_eight_neopixels3 U1_U_eight_neopixels4 U1_U_eight_neopixels5 U1_U_eight_neopixels6 U1_U_eight_neopixels7 U1_U_eight_neopixels8 U2_U_eight_neopixels1 U2_U_eight_neopixels2 U2_U_eight_neopixels3 U2_U_eight_neopixels4 U2_U_eight_neopixels5 U2_U_eight_neopixels6 U2_U_eight_neopixels7 U2_U_eight_neopixels8 U3_U_eight_neopixels1 U3_U_eight_neopixels2 U3_U_eight_neopixels3 U3_U_eight_neopixels4 U3_U_eight_neopixels5 U3_U_eight_neopixels6 U3_U_eight_neopixels7 U3_U_eight_neopixels8 U4_U_eight_neopixels1 U4_U_eight_neopixels2 U4_U_eight_neopixels3 U4_U_eight_neopixels4 U4_U_eight_neopixels5 U4_U_eight_neopixels6 U4_U_eight_neopixels7 U4_U_eight_neopixels8 U5_U_eight_neopixels1 U5_U_eight_neopixels2 U5_U_eight_neopixels3 U5_U_eight_neopixels4 U5_U_eight_neopixels5 U5_U_eight_neopixels6 U5_U_eight_neopixels7 U5_U_eight_neopixels8 U6_U_eight_neopixels1 U6_U_eight_neopixels2 U6_U_eight_neopixels3 U6_U_eight_neopixels4 U6_U_eight_neopixels5 U6_U_eight_neopixels6 U6_U_eight_neopixels7 U6_U_eight_neopixels8 U7_U_eight_neopixels1 U7_U_eight_neopixels2 U7_U_eight_neopixels3 U7_U_eight_neopixels4 U7_U_eight_neopixels5 U7_U_eight_neopixels6 U7_U_eight_neopixels7 U7_U_eight_neopixels8: "Intelligent control LED integrated light source", Package=None, Availability=Unavailable, MP=WS2812B-B, Price=None

## Via types
v1: diameter 0.7, hole 0.3, Top Layer to Bottom Layer, 128 vias

## Nets (pads, with @x,y where several pads share a name; then routed paths per layer and width w, separated by ;. In a path a pad name is that pad's centre, name@x,y a point inside that pad or via, vN(x,y) a via of type N, cw(c..) or ccw(c..) an arc to the next point about the centre after c; other vN are vias at no path point)
DIN: J0.2 U0_U_eight_neopixels5.4 | length 8.7
  Top Layer w0.381: U0_U_eight_neopixels5.4@54.9,61.7 54.9,61.4 55.16,61.14 57.22,61.14 58.945,59.416 58.945,57.645 J0.2@57.7,56.4

## Text inside footprints (layer, text, board x,y; h text height)
C0: Top Overlay "+" at 62.933,39.69 h1.3 r180
J0: Top Overlay "RefDes" at 61.9,53.05 h1.27 r90; Top Overlay "REFDES" at 63.7,52.65 h1.27 r90; Mechanical 13 "RefDes2" at 61.9,52.5 h1.27 r90